# Altium PCB motherboard.PcbDoc
Units mil, origin at the board's own origin, x right, y up, seen from the top; angles counter-clockwise.
Board outline 6000 x 4000 mil, 2 copper layers (Top Layer, Bottom Layer); 50 components, 52 nets, 326 pads, 99 vias.
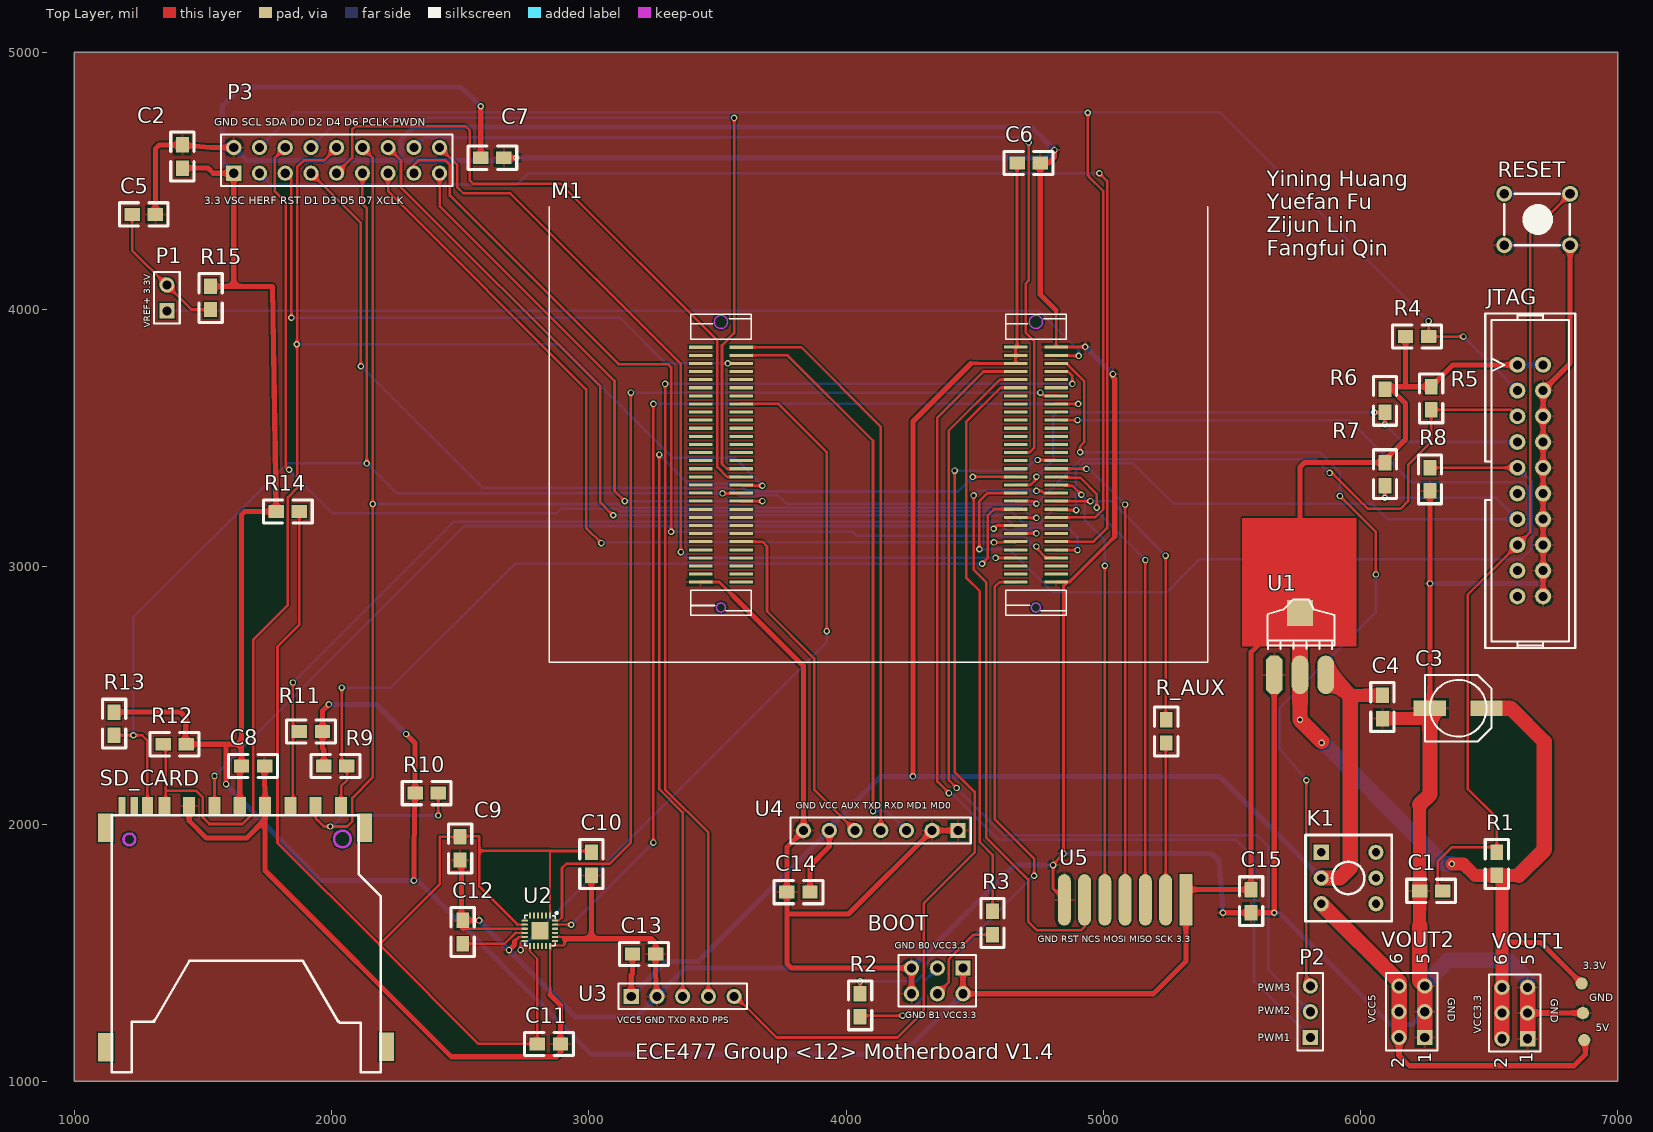
[diagram p0: Top Layer view]
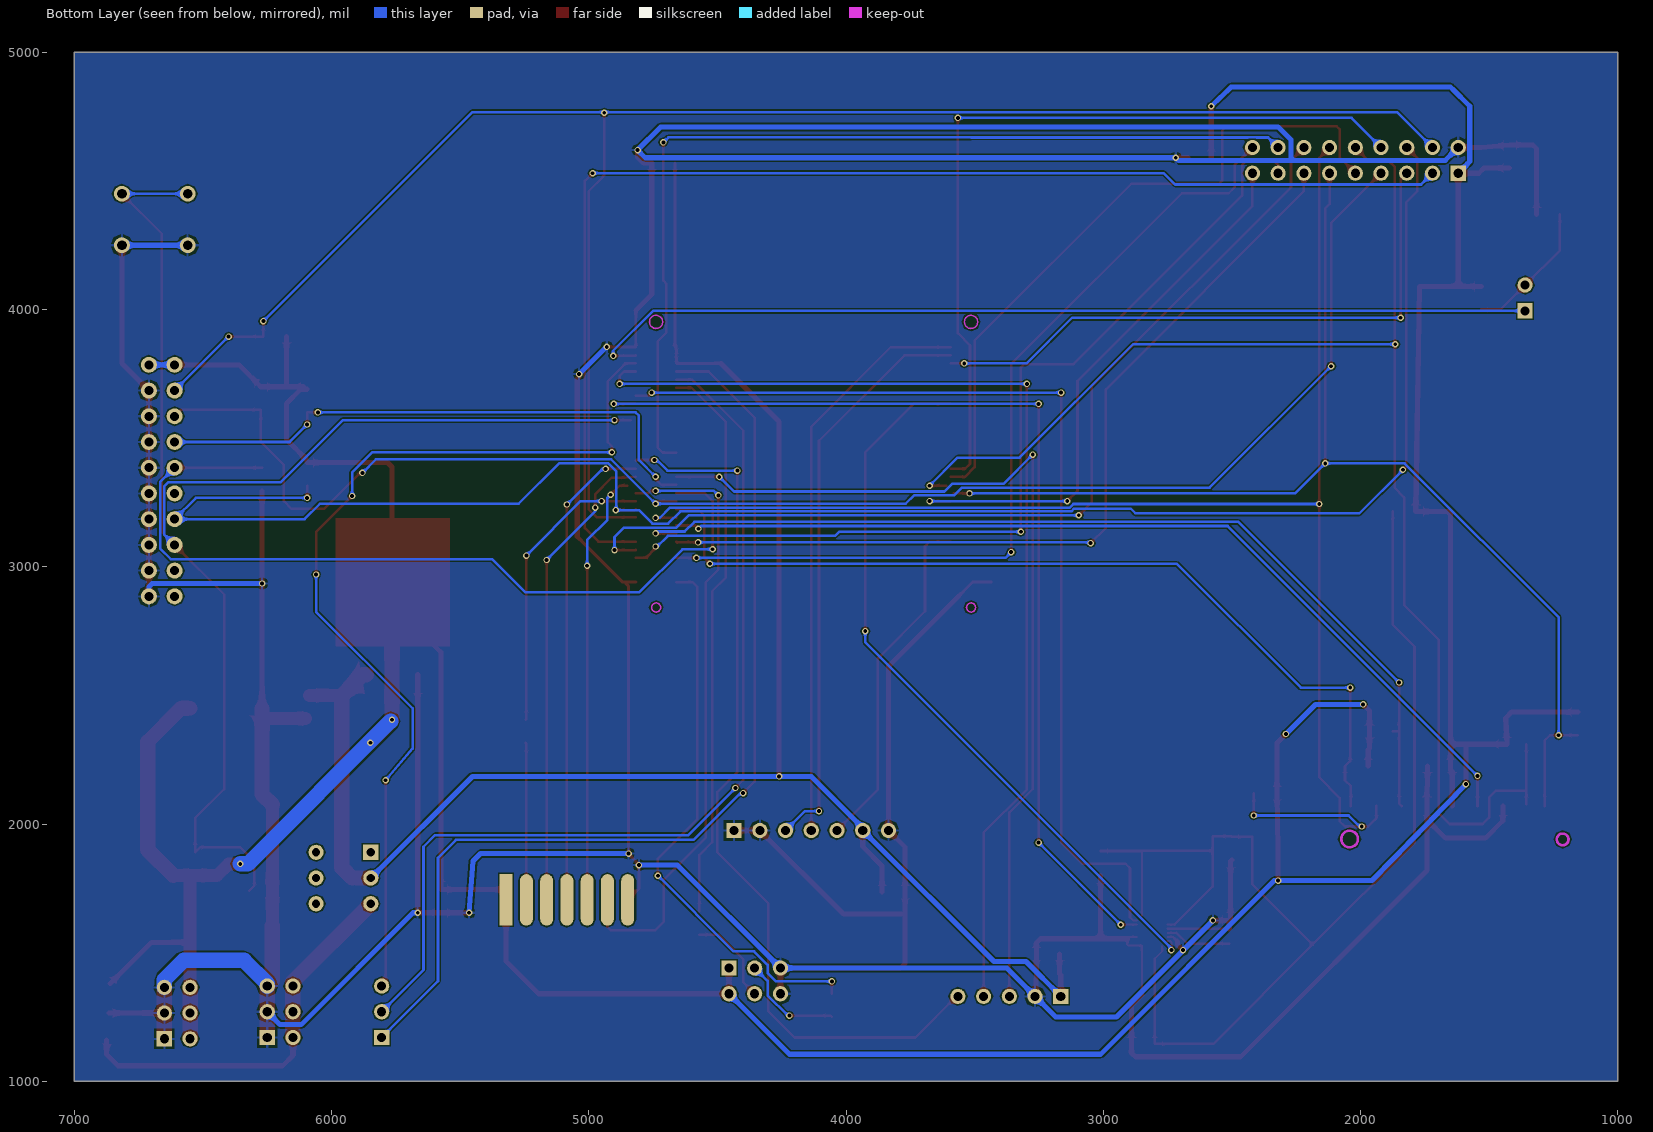
[diagram p1: Bottom Layer view, seen from below]

## Layer stack, top to bottom
Top Solder: solder mask 0.4, Solder Resist, Dk 3.5
Top Layer: signal copper 1.4
Dielectric 1: dielectric 12.6, FR-4, Dk 4.8
Bottom Layer: signal copper 1.4
Bottom Solder: solder mask 0.4, Solder Resist, Dk 3.5

## Board outline
1000,1000 7000,1000 7000,5000 1000,5000

## Design rules (kind name [scope] priority, off if disabled: settings)
Clearance Clearance_1 [All] p1: gap=5 ignorepadtopadclearanceinfootprint=TRUE except(0: Arc-Hole Track-Hole SMDPad-Hole THPad-Hole Via-Hole Fill-Hole Poly-Hole Region-Hole Text-Hole; 2: SMDPad-SMDPad)
Clearance [InNet('GND') vs InNet('VCC5')] p2: gap=10 ignorepadtopadclearanceinfootprint=TRUE
ComponentClearance [All] p1: gap=6 collisioncheckmode=3 verticalgap=10 showdistances=FALSE
FlightTimeFalling [All] p1: maximum=1.000n
FlightTimeRising [All] p1: maximum=1.000n
HoleToHoleClearance [All] p1: gap=0 allowstackedmicrovias=TRUE
MaxMinImpedance [All] p1: minimum=1.000 maximum=10.00
MinimumSolderMaskSliver imu_min_solder_mask_silver [HasFootprint('QFN24-t') vs HasFootprint('No Footprint')] p1: minsoldermaskwidth=10
MinimumSolderMaskSliver all_min_solder_mask_silver [All vs HasFootprint('No Footprint')] p2: minsoldermaskwidth=0
OvershootFalling [All] p1: maximum=1.000
OvershootRising [All] p1: maximum=1.000
ParallelSegment dcmi [InNetClass('dcmi') vs InNetClass('dcmi')] p1: limit=10000 gap=10
ParallelSegment sdio [InNetClass('sdio') vs InNetClass('sdio')] p2: limit=10000 gap=10
ParallelSegment spi [InNetClass('spi') vs InNetClass('spi')] p3: limit=10000 gap=10
PolygonConnect [All] p1: connectstyle=Relief reliefconductorwidth=10 reliefentries=4 polygonreliefangle="90 Angle" airgapwidth=10
RoutingVias [All] p1: holewidth=15 width=25 viastyle="Through Hole" minholewidth=15 minwidth=25 maxholewidth=15 maxwidth=25
SMDNeckDown [All] p1: percent=100.000
SignalBaseValue [All] p1: maximum=0.000
SignalStimulus [All] p1: kind=1 level=0 starttime=10.00n stoptime=60.00n periodtime=100.0n
SignalTopValue [All] p1: minimum=5.000
SilkToSilkClearance [All] p1: silktosilkclearance=0
SilkToSolderMaskClearance imu_silk_to_solder [IsPad vs HasFootprint('QFN24-t')] p1: minsilkscreentomaskgap=0 clearancetoexposedcopper=TRUE
SilkToSolderMaskClearance "all silk to solder" [IsPad] p2: minsilkscreentomaskgap=0 clearancetoexposedcopper=TRUE
SlopeFalling [All] p1: maxslope=1.000n
SlopeRising [All] p1: maxslope=1.000n
SolderMaskExpansion [All] p1: expansion=4
SupplyNets [All] p1: voltage=0.000
UndershootFalling [All] p1: maximum=1.000
UndershootRising [All] p1: maximum=1.000
Width vcc5 [InNet('VCC5')] p1: maxlimit=60 minlimit=10 preferedwidth=20 minimp=50.000000 maximp=50.000000 favimp=50.000000
Width gnd [InNet('GND')] p2: maxlimit=60 minlimit=7 preferedwidth=20 minimp=50.000000 maximp=50.000000 favimp=50.000000
Width vcc3 [InNet('VCC3.3')] p3: maxlimit=60 minlimit=10 preferedwidth=20 minimp=50.000000 maximp=50.000000 favimp=50.000000
Width vbtn [InNet('VBTN')] p4: maxlimit=60 minlimit=20 preferedwidth=20 minimp=50.000000 maximp=50.000000 favimp=50.000000
Width [All] p5: maxlimit=20 minlimit=7 preferedwidth=10 minimp=50.000000 maximp=50.000000 favimp=50.000000
25 further rules are at their usual default settings.

## Components (designator, comment, footprint, x,y, rotation, side; value= is the part's Value field where it differs from the comment)
3.3V "TEST POINT" TP-1.5 6860,1380 r0 top locked
5V "TEST POINT" TP-1.5 6870,1160 r0 top locked
BOOT "BOOT" HDR2X3 4455,1440 r180 top
C1 "104" 0805 6320,1740 r180 top
C2 "104" 0805 1420.06,4640 r270 top
C3 "220uF" CC6.56.5 6380,2450 r180 top
C4 "104" 0805 6085.06,2500 r270 top
C5 "6pF" 0805 1315,4370 r180 top
C6 "104" 0805 4755,4569.94 r180 top
C7 "104" 0805 2580,4590.06 r0 top
C8 "104" 0805 1740,2224.94 r180 top
C9 "104" 0805 2499.94,1860 r90 top
C10 "104" 0805 3009.94,1800 r90 top
C11 "104" 0805 2890,1145 r180 top
C12 "104" 0805 2510,1625 r270 top
C13 "104" 0805 3260,1494.94 r180 top
C14 "104" 0805 3770,1735.06 r0 top
C15 "104" 0805 5575.06,1745 r270 top
GND "TEST POINT" TP-1.5 6865,1265 r0 top locked
JTAG "JTAG" JTAG_20 6660,3335 r270 top
K1 "BUTTON" BTN8.5*8.5 5847.4,1890 r0 top
M1 "STM32F4&F7_CB" STM32F4&F7_CB 4817,3853.46 r180 top
P1 "VREF_SEL" HDR1X2 1360,3995 r90 top
P2 "PWM" HDR1X3 5805,1170 r90 top
P3 "OV5640" HDR2X9 1620,4530 r0 top
R1 "0R" 0805 6530,1890 r270 top
R2 "10K" 0805 4055.06,1340 r270 top
R3 "10K" 0805 4569.94,1570 r90 top
R4 "10K" 0805 6175,3895.06 r0 top
R5 "10K" 0805 6275.06,3700 r270 top
R6 "10K" 0805 6095,3690 r270 top
R7 "10K" 0805 6095.06,3405 r270 top
R8 "10K" 0805 6269.94,3295 r90 top
R9 "47K" 0805 2060,2224.94 r180 top
R10 "47K" 0805 2415,2119.94 r180 top
R11 "47K" 0805 1875,2360 r0 top
R12 "47K" 0805 1345,2310.06 r0 top
R13 "47K" 0805 1154.94,2345 r90 top
R14 "10R" 0805 1875,3215 r180 top
R15 "10R" 0805 1530,4000 r90 top
R_AUX "0R" 0805 5245.06,2405 r270 top
RESET "KEY_M" KEY_M 6559.09,4450 r0 top
SD_CARD "sd card" SDCARD_L 1938,2070 r0 top
U1 "AMS1117-3.3" AMS1117 5664.97,2580.06 r0 top
U2 "MPU9250" QFN24-t 2849.5,1644 r270 top
U3 "GPS" HDR1X5 3165,1330 r0 top
U4 "AS61-T17" HDR1X7 4435,1975 r180 top
U5 "NA" "Edge Connector7" 5321.22,1705 r180 top
VOUT1 "VCC3.3" HDR2X3 6650,1165 r90 top
VOUT2 "VCC5" HDR2X3 6250,1170 r90 top

## Footprints (in the part's own frame and the unit in brackets; to place one, negate y for a bottom-side part, rotate by r counter-clockwise, add the part's x,y. Pads: shape width x height; smd on the part's side, far side on the other; paste and mask are expansions set on the pad)
0805 [mil]
  rect 60x50 smd: 1(0,-0.06) 2(90,-0.06)
  silkscreen extent -50,-45 140,45
AMS1117 [mil]
  oct 65x150 smd: 1(0.03,-0.06)
  oval 65x150 smd: 2(100.03,-0.06) 3(200.03,-0.06)
  rect 100x100 smd: 4(100.03,239.94)
  silkscreen extent -26,100 234,293
BTN8.5*8.5 [mm]
  rect 1.5x1.5 hole 0.8: 1(0,0)
  round 1.5 hole 0.8: 2(0,-2.54) 3(0,-5.08) 4(5.4,-5.08) 5(5.4,-2.54) 6(5.4,0)
  silkscreen extent -1.55,-6.79 6.95,1.71
CC6.56.5 [mm]
  rect 3.2x1.5 smd: 1(-2.794,0) 2(2.8,0)
  silkscreen extent -3.3,-3.3 3.3,3.3
"Edge Connector7" [mm]
  rect 1.27x5.08 smd: 1(0,0)
  oval 1.27x5.08 smd: 2(2,0) 3(4,0) 4(6,0) 5(8,0) 6(10,0) 7(12,0)
  rect 1.27x5.08 smd far side: B1(0,0)
  oval 1.27x5.08 smd far side: B2(2,0) B3(4,0) B4(6,0) B5(8,0) B6(10,0) B7(12,0)
HDR1X2 [mm]
  rect 1.5x1.5 hole 0.9: 1(0,0)
  round 1.5 hole 0.9: 2(2.54,0)
  silkscreen extent -1.27,-1.27 3.81,1.27
HDR1X3 [mm] "Connector; Header; 3 Position"
  rect 1.5x1.5 hole 0.9: 1(0,0)
  round 1.5 hole 0.9: 2(2.54,0) 3(5.08,0)
  silkscreen extent -1.27,-1.27 6.35,1.27
HDR1X5 [mm] "Connector; Header; 5 Position"
  rect 1.5x1.5 hole 0.9: 1(0,0)
  round 1.5 hole 0.9: 2(2.54,0) 3(5.08,0) 4(7.62,0) 5(10.16,0)
  silkscreen extent -1.27,-1.27 11.43,1.27
HDR1X7 [mm] "Connector; Header; 7 Position"
  rect 1.5x1.5 hole 0.9: 1(0,0)
  round 1.5 hole 0.9: 2(2.54,0) 3(5.08,0) 4(7.62,0) 5(10.16,0) 6(12.7,0) 7(15.24,0)
  silkscreen extent -1.27,-1.27 16.51,1.27
HDR2X3 [mm]
  rect 1.5x1.5 hole 0.9: 1(0,0)
  round 1.5 hole 0.9: 2(0,2.54) 3(2.54,0) 4(2.54,2.54) 5(5.08,0) 6(5.08,2.54)
  silkscreen extent -1.27,-1.27 6.35,3.81
HDR2X9 [mm]
  rect 1.5x1.5 hole 0.9: 1(0,0)
  round 1.5 hole 0.9: 2(0,2.54) 3(2.54,0) 4(2.54,2.54) 5(5.08,0) 6(5.08,2.54) 7(7.62,0) 8(7.62,2.54) 9(10.16,0) 10(10.16,2.54) 11(12.7,0) 12(12.7,2.54) 13(15.24,0) 14(15.24,2.54) 15(17.78,0) 16(17.78,2.54) 17(20.32,0) 18(20.32,2.54)
  silkscreen extent -1.27,-1.27 21.59,3.81
JTAG_20 [mil]
  round 62 hole 35: 1(-450,-50) 2(-450,50) 3(-350,-50) 4(-350,50) 5(-250,-50) 6(-250,50) 7(-150,-50) 8(-150,50) 9(-50,-50) 10(-50,50) 11(50,-50) 12(50,50) 13(150,-50) 14(150,50) 15(250,-50) 16(250,50) 17(350,-50) 18(350,50) 19(450,-50) 20(450,50)
  silkscreen extent -650,-175 650,175
KEY_M [mil]
  round 62 hole 38: 1(0,0) 1(255.91,0) 2(0,-200) 2(255.91,-200)
  silkscreen extent 0,-200 255,0
QFN24-t [mm]
  rrect50% 0.6x0.2 smd: 1(0,0) 2(0,-0.4) 3(0,-0.8) 4(0,-1.2) 5(0,-1.6) 6(0,-2) 13(3,-2) 14(3,-1.6) 15(3,-1.2) 16(3,-0.8) 17(3,-0.4) 18(3,0)
  rrect50% 0.2x0.6 smd: 7(0.5,-2.5) 8(0.9,-2.5) 9(1.3,-2.5) 10(1.7,-2.5) 11(2.1,-2.5) 12(2.5,-2.5) 19(2.5,0.5) 20(2.1,0.5) 21(1.7,0.5) 22(1.3,0.5) 23(0.9,0.5) 24(0.5,0.5)
  rect 1.7x1.7 smd: 25(1.499,-1.003)
  silkscreen extent -0.36,-2.5 3,0.76
SDCARD_L [mm]
  rect 1.2x1.8 smd: 1(0,0) 2(-2.489,0) 3(-4.983,-0.009) 4(-7.483,-0.009) 5(-9.983,-0.009) 6(-12.483,-0.009) 7(-14.908,-0.009) 9(2.517,-0.009)
  rect 1.1x1.8 smd: 8(-16.612,0)
  rect 0.7x1.8 smd: 10(-17.908,-0.009) 12(-19.101,0)
  rect 1.5x2.8 smd: 11(-20.726,-23.834) 11(-20.726,-2.143) 11(4.826,-2.143) 11(7.01,-23.784)
  Keep-Out Layer circle w0.254: c-18.39,-3.3 r0.58
  Keep-Out Layer circle w0.254: c2.642,-3.26 r0.82
  silkscreen extent -20.13,-26.3 6.44,-0.9
STM32F4&F7_CB [mm]
  rect 2.3x0.3 smd: J1_1(0,0) J1_2(0,0.8) J1_3(0,1.6) J1_4(0,2.4) J1_5(0,3.2) J1_6(0,4) J1_7(0,4.8) J1_8(0,5.6) J1_9(0,6.4) J1_10(0,7.2) J1_11(0,8) J1_12(0,8.8) J1_13(0,9.6) J1_14(0,10.4) J1_15(0,11.2) J1_16(0,12) J1_17(0,12.8) J1_18(0,13.6) J1_19(0,14.4) J1_20(0,15.2) J1_21(0,16) J1_22(0,16.8) J1_23(0,17.6) J1_24(0,18.4) J1_25(0,19.2) J1_26(0,20) J1_27(0,20.8) J1_28(0,21.6) J1_29(0,22.4) J1_30(0,23.2) J1_31(4,23.2) J1_32(4,22.4) J1_33(4,21.6) J1_34(4,20.8) J1_35(4,20) J1_36(4,19.2) J1_37(4,18.4) J1_38(4,17.6) J1_39(4,16.8) J1_40(4,16) J1_41(4,15.2) J1_42(4,14.4) J1_43(4,13.6) J1_44(4,12.8) J1_45(4,12) J1_46(4,11.2) J1_47(4,10.4) J1_48(4,9.6) J1_49(4,8.8) J1_50(4,8) J1_51(4,7.2) J1_52(4,6.4) J1_53(4,5.6) J1_54(4,4.8) J1_55(4,4) J1_56(4,3.2) J1_57(4,2.4) J1_58(4,1.6) J1_59(4,0.8) J1_60(4,0) J2_1(31.1,0.001) J2_2(31.1,0.801) J2_3(31.1,1.601) J2_4(31.1,2.401) J2_5(31.1,3.201) J2_6(31.1,4.001) J2_7(31.1,4.801) J2_8(31.1,5.601) J2_9(31.1,6.401) J2_10(31.1,7.201) J2_11(31.1,8.001) J2_12(31.1,8.801) J2_13(31.1,9.601) J2_14(31.1,10.401) J2_15(31.1,11.201) J2_16(31.1,12.001) J2_17(31.1,12.801) J2_18(31.1,13.601) J2_19(31.1,14.401) J2_20(31.1,15.201) J2_21(31.1,16.001) J2_22(31.1,16.801) J2_23(31.1,17.601) J2_24(31.1,18.401) J2_25(31.1,19.201) J2_26(31.1,20.001) J2_27(31.1,20.801) J2_28(31.1,21.601) J2_29(31.1,22.401) J2_30(31.1,23.201) J2_31(35.1,23.201) J2_32(35.1,22.401) J2_33(35.1,21.601) J2_34(35.1,20.801) J2_35(35.1,20.001) J2_36(35.1,19.201) J2_37(35.1,18.401) J2_38(35.1,17.601) J2_39(35.1,16.801) J2_40(35.1,16.001) J2_41(35.1,15.201) J2_42(35.1,14.401) J2_43(35.1,13.601) J2_44(35.1,12.801) J2_45(35.1,12.001) J2_46(35.1,11.201) J2_47(35.1,10.401) J2_48(35.1,9.601) J2_49(35.1,8.801) J2_50(35.1,8.001) J2_51(35.1,7.201) J2_52(35.1,6.401) J2_53(35.1,5.601) J2_54(35.1,4.801) J2_55(35.1,4.001) J2_56(35.1,3.201) J2_57(35.1,2.401) J2_58(35.1,1.601) J2_59(35.1,0.801) J2_60(35.1,0.001)
  Keep-Out Layer circle w0.152: c33.1,25.701 r0.45
  Keep-Out Layer circle w0.152: c33.1,-2.499 r0.65
  Keep-Out Layer circle w0.152: c2,-2.5 r0.65
  Keep-Out Layer circle w0.152: c2,25.7 r0.45
  silkscreen extent -14.95,-13.87 50.05,31.13
TP-1.5 [mm]
  round 1.2 smd: 1(0,0)

## Part data
3.3V 5V GND: library part TEST-POINT, "测试点"
BOOT VOUT1 VOUT2: library part "Header 3X2", "Header, 3-Pin, Dual row"
  VOUT1 VOUT2: LatestRevisionDate=17-Jul-2002, LatestRevisionNote="Re-released for DXP Platform.", Publisher="Altium Limited"
C1 C2 C4 C5 C6 C7 C8 C9 C10 C11 C12 C13 C14 C15: library part C
C3: library part CAP
M1: "F429/746 Core Board"
P1: library part "Header 2", "Header, 2-Pin"
P2: library part "Header 3", "Header, 3-Pin", LatestRevisionDate=17-Jul-2002, LatestRevisionNote="Re-released for DXP Platform.", Publisher="Altium Limited"
P3: library part "Header 9X2", "Header, 9-Pin, Dual row"
R1 R2 R3 R4 R5 R6 R7 R8 R9 R10 R11 R12 R13 R14 R15 R_AUX: library part R
U1: library part AMS1117
U2: "9轴运动处理传感器"
U3: library part "Header 5", "Header, 5-Pin", LatestRevisionDate=17-Jul-2002, LatestRevisionNote="Re-released for DXP Platform.", Publisher="Altium Limited"
U4: library part "Header 7", "Header, 7-Pin", LatestRevisionDate=17-Jul-2002, LatestRevisionNote="Re-released for DXP Platform.", Publisher="Altium Limited"
U5: library part ESP8266SPI

## Via types
v1: diameter 25, hole 15, Top Layer to Bottom Layer, tented both sides, 99 vias

## Nets (pads, with @x,y where several pads share a name; then routed paths per layer and width w, separated by ;. In a path a pad name is that pad's centre, name@x,y a point inside that pad or via, vN(x,y) a via of type N, cw(c..) or ccw(c..) an arc to the next point about the centre after c; other vN are vias at no path point)
9D_INT: M1.J2_8 U2.12 | length 2887.9
  Top Layer w7.87: v1(2735,1510) 2735,1541.57 2739,1545.57 U2.12
  Top Layer w10: M1.J2_8@3592.48,3632.95 M1.J2_8 3737.5,3632.95 3925,3445.45 v1(3925,2750)
  Bottom Layer w7.87: v1(2735,1510) 2735,1516 v1@2739,1520
  Bottom Layer w10: v1@2739,1520 3925,2706 v1(3925,2750)
AS_AUX: M1.J2_25 U4.5 | length 1354.2
  Top Layer w10: M1.J2_25@3592.48,3097.52 M1.J2_25 3675,3097.52 3693,3079.52 3693,2827 3876,2644 3876,2134 U4.5
AS_RXD: M1.J2_2 U4.3 | length 2251
  Top Layer w10: M1.J2_2@3592.48,3821.93 3773,3821.93 4105,3489.93 v1(4105,2050)
  Bottom Layer w10: v1(4105,2050) 4160,2050 U4.3
AS_TXD: M1.J2_1 U4.4 | length 2240.3
  Top Layer w10: M1.J2_1@3592.48,3853.42 M1.J2_1 3826.58,3853.42 4135,3545 U4.4
BOOT0: M1.J1_31 R2.1 | length 2188.4
  Top Layer w10: R2.1 v1(4055,1388) ; M1.J1_31@4659.39,2940.08 4597.08,2940.08 4577.5,2920.5 4577.5,2019 4731,1865.5 v1(4731,1799)
  Bottom Layer w10: v1(4055,1388) 4273,1388 4305,1420 4305,1452.5 4357.5,1505 4437,1505 v1(4731,1799)
BOOT1: M1.J1_55 R3.2 | length 2192.6
  Top Layer w10: R3.2 4570,1880 4520,1930 4520,2905 4467,2958 4467,3562 4600.98,3695.98 M1.J1_55@4659.39,3695.98
DCMI_D0: M1.J2_16 P3.8 | length 3139.5
  Top Layer w10: v1(3565,4745) 3565,3908 3517.93,3860.93 3517.93,3400.05 3537,3380.98 M1.J2_16@3592.48,3380.98
  Bottom Layer w10: P3.8 2035,4745 v1(3565,4745)
DCMI_D1: M1.J2_17 P3.9 | length 2679.2
  Top Layer w10: P3.9 2080,4590 2080,4700 2092.5,4712.5 2520,4712.5 2537.5,4695 2537.5,4501.5 2550,4489 2891,4489 3500,3880 3500,3387 3537.51,3349.49 M1.J2_17@3592.48,3349.49
DCMI_D2: M1.J2_18 P3.10 R12.1 SD_CARD.7 | length 5557.1
  Top Layer w10: SD_CARD.7@1355,2076.07 R12.1@1355,2310 ; 1361.07,2130 1473,2130 1500,2103 1500,2025 1525,2000 1654,2000 1695,2041 1695,2716 1830,2851 1830,3270 1866.5,3306.5 1866.5,3863.5 v1(1865,3865) ; v1@1866.5,3865 1866.5,4553.5 1893,4580 1970,4580 P3.10 ; M1.J2_18@3609.49,3315 v1(3675,3315)
  Bottom Layer w10: v1(1865,3865) 2884,3865 3325,3424 3566,3424 v1(3675,3315)
DCMI_D3: M1.J2_19 P3.11 R13.1 SD_CARD.8 | length 4633.4
  Top Layer w10: R13.1 1264,2345 1284,2325 1284,2169 SD_CARD.8 ; P3.11 2120,4410 2137,4393 v1(2137,3402) ; v1(3520,3285) M1.J2_19@3580.98,3285
  Bottom Layer w10: v1(1230,2345) 1230,2803.82 1828.18,3402 v1(2137,3402) 2254,3285 v1(3520,3285)
DCMI_D4: M1.J1_39 P3.12 R10.1 SD_CARD.1 | length 6114.9
  Top Layer w10: SD_CARD.1 1938,2022 1940.5,2019.5 ; 1938.04,2022 1940.5,2019.5 ; 1973.33,1990.31 v1(1995,1990.15) ; P3.12 2160,4590 v1(2160,3244) 2160,2181 2080.63,2101.63 2080.63,2010.63 2060.15,1990.15 v1(1995,1990.15) ; v1(2415,2033) R10.1 ; M1.J1_39@4659.39,3192.05 4661.44,3190 v1(4740,3190) ; 1940.5,2019.5 1944.57,2015.37 1944.63,2015.37 1969.85,1990.15 v1(1995,1990.15)
  Bottom Layer w10: v1(1995,1990.15) 2003.15,1990.15 2046,2033 v1(2415,2033) ; v1(2160,3244) 3116,3244 3130,3230 4684.05,3230 4724.05,3190 v1(4740,3190)
DCMI_D5: M1.J1_36 P3.13 | length 3394.5
  Top Layer w10: P3.13 2220,4460 2990,3690 2990,3151 v1(3049,3092) ; v1(4575,3095) 4655.72,3095 4656.28,3094.44 M1.J1_36@4659.39,3097.56
  Bottom Layer w10: v1(3049,3092) 3052,3095 v1(4575,3095)
DCMI_D6: M1.J1_26 P3.14 | length 3756.2
  Top Layer w10: P3.14 2270,4580 2270,4475 3045,3700 3045,3250 v1(3095,3200) ; M1.J1_26@4816.87,3066.06 4817.94,3065 v1(4900,3065)
  Bottom Layer w10: v1@3105,3200 4611.57,3200 4659.07,3152.5 4862.5,3152.5 4900,3115 v1(4900,3065)
DCMI_D7: M1.J1_27 P3.15 | length 3624.7
  Top Layer w10: P3.15 2320,4562.5 2337.5,4580 2442.5,4580 2460,4562.5 2460,4443 3115.5,3787.5 3307.5,3787.5 3320,3775 v1(3320,3136) ; v1(4740,3078.78) 4740,3072.57 4778,3034.57 M1.J1_27@4816.87,3034.57
  Bottom Layer w10: v1(3320,3136) 4027,3136 4043,3120 4692.57,3120 4733.78,3078.78 v1(4740,3078.78)
DCMI_HREF: M1.J2_3 P3.5 | length 2394
  Top Layer w10: P3.5 1844,4506 v1(1844,3968) ; v1(3540.43,3790.43) M1.J2_3@3592.48,3790.43
  Bottom Layer w10: v1(1844,3968) 3121,3968 3298.57,3790.43 v1(3540.43,3790.43)
DCMI_PCLK: M1.J1_47 P3.16 | length 3700.5
  Top Layer w10: M1.J1_47@4659.39,3444.01 M1.J1_47 4712.51,3444.01 4731,3462.5 4731,3877 4698,3910 4698,4100 4710,4112 v1(4710,4650)
  Bottom Layer w10: P3.16 2358.76,4668.76 2402.86,4668.76 2403.63,4669.53 2436.37,4669.53 2437.14,4668.76 3512.42,4668.76 3513.19,4669.53 4690.47,4669.53 v1(4710,4650)
DCMI_PWDN: M1.J1_34 P3.18 | length 3378.8
  Top Layer w10: P3.18 2489,4561 2489,4475 2512,4452 2694,4452 3358,3788 v1(3358,3057) ; v1(4581.43,3034.57) M1.J1_34@4659.39,3034.57
  Bottom Layer w10: v1(3358,3057) 3380.43,3034.57 v1(4581.43,3034.57)
DCMI_RESET: JTAG.5 M1.J1_41 P3.7 R5.2 | length 6109.7
  Top Layer w10: P3.7 2114,4336 v1(2114,3779.5) ; M1.J1_41@4659.39,3255.04 M1.J1_41 4729.96,3255.04 v1(4740,3245) ; v1(5880,3365) 5890,3365 6030,3225 6155,3225 6185,3255 6185,3395 6275,3485 R5.2 6585,3610 JTAG.5
  Bottom Layer w10: v1(2114,3779.5) 2586,3307.5 3549.65,3307.5 3579.65,3277.5 3735.5,3277.5 3768,3245 v1(4740,3245) 4913.01,3418.01 5826.99,3418.01 v1(5880,3365)
DCMI_SCL: JTAG.3 M1.J1_22 P3.4 R4.2 | length 7190.2
  Top Layer w10: M1.J1_22@4816.87,3192.05 M1.J1_22 4968.87,3192.05 5000,3223.18 5000,4460 4945,4515 ; v1(4940,4765) 4940,4523 4945,4518 ; v1(6265,3955) R4.2 v1(6400,3895)
  Bottom Layer w10: P3.4 1857.5,4767.5 4940,4767.5 5452.5,4767.5 v1(6265,3955) ; v1(6400,3895) JTAG.3
DCMI_SDA: JTAG.13 M1.J1_21 P3.6 R7.2 | length 7124.3
  Top Layer w10: P3.6 1780,4590 1780,4459 1821.23,4417.77 1821.23,3390.77 v1(1835,3377) ; M1.J1_21 4820.54,3220 v1(4895,3220) ; v1(6095,3268) R7.2
  Bottom Layer w10: v1(1835,3377) 2004,3208 2875,3208 2893,3226 3112.79,3226 3123.79,3215 4643.92,3215 4691.42,3167.5 4752.5,3167.5 4805,3220 v1(4895,3220) 4892.5,3222.5 4892.5,3370.34 4925.17,3403.01 5114.49,3403.01 5272.5,3245 6045,3245 6105,3185 JTAG.13 6527,3268 v1(6095,3268)
DCMI_VSYNC: M1.J1_25 P3.3 | length 4913.7
  Top Layer w10: M1.J1_25@4816.87,3097.56 M1.J1_25 4962.56,3097.56 5015,3150 5015,3324.57 5015,4500 v1(4985,4530)
  Bottom Layer w10: P3.3 1764,4486 2721,4486 2765,4530 v1(4985,4530)
DCMI_XCLK: M1.J2_20 P3.17 | length 2190.8
  Top Layer w10: P3.17 2420,4403 3100,3723 3100,3295 v1(3140,3255) ; M1.J2_20@3592.48,3255 M1.J2_20 v1(3675,3255)
  Bottom Layer w10: v1(3140,3255) v1(3675,3255)
GND: BOOT.5 BOOT.6 C1.2 C2.1 C3.2 C4.2 C5.1 C6.1 C7.2 C8.1 C9.1 C10.1 C11.1 C12.1 C13.1 C14.1 C15.2 GND.1 JTAG.4 JTAG.6 JTAG.8 JTAG.10 JTAG.12 JTAG.14 JTAG.16 JTAG.18 JTAG.20 M1.J1_1 M1.J1_30 M1.J2_31 P3.2 R8.1 RESET.2 SD_CARD.3 SD_CARD.6 U1.1 U2.9 U2.11 U2.18 U2.20 U3.2 U4.1 U4.2 U4.7 U5.7 VOUT1.1 VOUT1.3 VOUT1.5 VOUT2.1 VOUT2.3 VOUT2.5 | length 28478.7
  Top Layer w7.87: 2511.75,1592.82 U2.9 ; 2711,1543 2729.32,1561.32 U2.11 ; 2849.5,1336 U2.18 2849.5,1527 2902,1527 2906,1531 2906,1554 2898.68,1561.32 U2.20
  Top Layer w10: M1.J1_1 4817,3996
  Top Layer w11.81: M1.J2_31@3435,2940.04 M1.J2_31 3508,2940.04 3562,2886.04 ; M1.J1_30@4816.87,2940.08 M1.J1_30 M1.J1_30@4848.78,2940.08 ; M1.J1_1@4816.87,3853.46 M1.J1_1 4818.54,3855 v1(4930,3855) ; U5.7 4805,1748.78 v1(4805,1840) 4805,1842.5 4845,1882.5 v1(4845,1885) 4845,2923.86 4855,2933.86 M1.J1_30@4848.78,2940.08 ; 5045,3117.08 4868,2940.08 M1.J1_30@4848.78,2940.08
  Top Layer w20: C5.1 1315,4625 1330,4640 C2.1 1530,4630 P3.2 ; SD_CARD.6 1446.54,2012.28 1513.82,1945 1668.99,1945 1741.82,2017.83 ; C8.1 1740,2147.82 1741.82,2146 SD_CARD.3 1741.82,2017.83 ; C9.1 2504.97,1855.03 2504.97,1629.97 C12.1 ; 2511.75,1592.82 2509.94,1594.63 C12.1 ; v1(2573.5,1625) C12.1 ; C7.2 v1(2718,4590) ; v1(2690,1510) 2711,1531 2711,1543 ; 2849.5,1336 2890,1295.5 C11.1 2890,1110 2875,1095 2465.82,1095 1741.82,1819 1741.82,2017.83 ; 2906,1554 3010,1554 ; C10.1 3010,1554 ; U3.2 3260,1418 C13.1 3260,1537.5 3243.5,1554 3010,1554 ; 3562,2886.04 3835,2613.04 U4.7 3770,1910 C14.1 3770,1457.5 3787.5,1440 BOOT.5 BOOT.6 ; 3775,1650 4010,1650 U4.2 U4.1 ; v1(4810,4620) 4810,4592.5 4787.5,4570 C6.1 4755,4058 4817,3996 ; v1(5037.5,3749.21) 5037.5,3737.96 5045,3730.46 5045,3117.08 ; v1(5465,1655) C15.2 v1(5665,1655) U1.1 ; VOUT2.1@6250,1150 VOUT2.1 ; v1(6269.76,2935) C3.2 6270,2872.47 R8.1 ; VOUT1.3 GND.1 ; JTAG.20 JTAG.18 JTAG.16 JTAG.14 JTAG.12 JTAG.10 JTAG.8 JTAG.6 JTAG.4 6815,3790 RESET.2@6815,4250
  Top Layer w50: C4.2@6100,2410 6255,2410 ; 6230,1615 C1.2 6230,2075
  Top Layer w58: 6269.76,2114.76 C3.2
  Top Layer w60: 6230,1605 6230,1390 VOUT2.5 VOUT2.3 VOUT2.1 ; 6230,2075 6269.76,2114.76 ; VOUT1.1 VOUT1.3 VOUT1.5
  Bottom Layer w20: P3.2 1670,4580 2260,4580 ; v1(2573.5,1625) v1@2690,1508.5 ; v1(2690,1510) v1@2690,1508.5 ; v1(4805,1840) 4655,1840 BOOT.5 3375,1440 U3.2 3185,1250 2948.5,1250 v1@2690,1508.5 ; v1(4845,1885) 5421,1885 5450,1856 v1(5465,1655) ; v1(4930,3855) 4930.86,3855 5036.64,3749.21 v1(5037.5,3749.21) ; v1(5665,1655) 5683,1655 6118,1220 6200,1220 VOUT2.3 ; v1(6269.76,2935) 6697,2935 6710,2922 JTAG.20 ; RESET.2@6559.09,4250 RESET.2@6815,4250 ; 2260,4580 2708,4580 v1(2718,4590) 4780,4590 v1(4810,4620) 4720,4710 2320,4710 2270,4660 2270,4590 2260,4580
  Bottom Layer w60: VOUT2.5 6250,1380 6340,1470 6575,1470 6650,1395 VOUT1.5
GPS_PPS: M1.J1_15 U3.5 | length 3473.3
  Top Layer w10: U3.5@3567.5,1332.5 3730,1170 4200,1170 4302.5,1272.5 4302.5,1692.5 4500,1890 4500,2125 4422,2203 v1(4422,3374) ; v1(4745,3415) 4814.39,3415 M1.J1_15@4816.87,3412.52
  Bottom Layer w10: v1(4422,3374) 4694,3374 4735,3415 v1(4745,3415)
GPS_RXD: M1.J1_4 U3.4 | length 4134.4
  Top Layer w10: v1(3297,3711) 3297,2135 3465,1967 U3.4 ; M1.J1_4@4816.87,3758.98 4862.5,3758.98 4880,3741.48 v1(4880,3711)
  Bottom Layer w10: v1(3297,3711) v1(4880,3711)
GPS_TXD: M1.J1_44 U3.3 | length 3612.1
  Top Layer w10: v1(3274,3436) 3274,2136 3365,2045 U3.3 ; v1(4492.53,3349.53) M1.J1_44@4659.39,3349.53
  Bottom Layer w10: v1(3274,3436) 3387.5,3322.5 3587.55,3322.5 3617.55,3292.5 4435.5,3292.5 v1(4492.53,3349.53)
IIC_SCL: M1.J1_8 U2.23 | length 3957.5
  Top Layer w7.87: U2.23 v1(2932,1608.57)
  Top Layer w10: v1(3251,1927.57) v1(3251,3632.99) ; M1.J1_8@4816.87,3632.99 v1(4903,3632.99)
  Bottom Layer w10: v1(2932,1608.57) v1(3251,1927.57) ; v1(3251,3632.99) v1(4903,3632.99)
IIC_SDA: M1.J1_7 U2.24 | length 3939.5
  Top Layer w7.87: U2.24 2882.82,1624.32 2896,1637.5
  Top Layer w10: 2896,1637.5 2896,1828.5 2912.5,1845 3081,1845 3164,1928 v1(3164,3677) ; v1(4755.98,3677) 4768.49,3664.49 M1.J1_7@4816.87,3664.49
  Bottom Layer w10: v1(3164,3677) v1(4755.98,3677)
JTCK: JTAG.9 M1.J1_42 R8.2 | length 3305.3
  Top Layer w10: v1(4518.5,3068) 4518.5,3255.03 4550,3286.53 M1.J1_42@4659.39,3286.53 ; R8.2 JTAG.9
  Bottom Layer w10: v1(4518.5,3068) 4636,3068 4803,2901 5247,2901 5376,3030 6625,3030 6666,3071 6666,3329 JTAG.9
JTMS: JTAG.7 M1.J1_43 R6.2 | length 2249.3
  Top Layer w10: M1.J1_43@4659.39,3318.03 4717.77,3318.03 4740,3340.26 v1(4740,3350) ; v1(6053,3600) R6.2 6094.94,3553.06 v1(6095,3553)
  Bottom Layer w10: v1(4740,3350) 4805,3415 4805,3587.5 4817.5,3600 v1(6053,3600) ; v1(6095,3553) 6163,3485 JTAG.7
NetBOOT_3: BOOT.3 R2.2 | length 411.4
  Top Layer w10: R2.2 4060,1255 v1(4220,1255)
  Bottom Layer w10: v1(4220,1255) 4225.9,1255 4305,1334.1 4305,1390 BOOT.3
NetBOOT_4: BOOT.4 R3.1 | length 363
  Top Layer w10: BOOT.4 4400,1385 4400,1475 4495,1570 R3.1
NetC5_2: C5.2 P1.2 R15.1 | length 540.4
  Top Layer w10: C5.2 1225,4230 P1.2 1455,4000 R15.1
NetC9_2: C9.2 C10.2 C11.2 R14.1 U2.1 U2.8 U2.13 | length 4843
  Top Layer w7.87: 2723,1608.57 U2.8 ; U2.13 2770.76,1505.24 2800,1476 ; U2.1 2849.5,1895 2849.5,1895.97
  Top Layer w10: R14.1 1875,2775 1790,2690 1790,1926.5 2185.75,1530.75 ; 2723,1608.57 2575,1756.57 2575,1895.97 ; 2800,1476 C11.2 2571.44,1145.06 2185.75,1530.75 ; 2849.5,1895 C10.2@3010,1895 ; 2849.5,1895.97 2575,1895.97 ; 2185.75,1530.75 2420,1765 2420,1950 C9.2 2502.5,1952.5 2575,1952.5 2575,1895.97
NetC12_2: C12.2 U2.10 | length 258.6
  Top Layer w7.87: 2715.46,1577.07 U2.10
  Top Layer w10: C12.2 2673.39,1535 2715.46,1577.07
NetR_AUX_2: R_AUX.2 U5.2 | length 611
  Top Layer w10: U5.2 5242.48,2312.48 R_AUX.2
PWM1: M1.J1_57 P2.1 | length 3936.2
  Top Layer w10: v1(4400,2120) 4355,2165 4355,3579.98 4534,3758.98 M1.J1_57@4659.39,3758.98
  Bottom Layer w10: v1(4400,2120) 4410,2120 4592,1938 5516,1938 5586,1868 5586,1389 P2.1
PWM2: M1.J1_56 P2.2 | length 3759.7
  Top Layer w10: v1(4430,2140) 4399.5,2170.5 4399.5,3528.98 4598,3727.48 M1.J1_56@4659.39,3727.48
  Bottom Layer w10: v1(4430,2140) 4613,1957 5597,1957 5642.5,1911.5 5642.5,1432.5 P2.2
PWM3: M1.J1_3 P2.3 | length 3712.2
  Top Layer w10: M1.J1_3@4816.87,3790.47 M1.J1_3 4857.53,3790.47 4926,3722 4926,3484 4910,3468 v1(4910,3445) ; P2.3@5790,1370 v1(5790,2170) ; v1(5920,3275) 6060,3135 v1(6060,2970)
  Bottom Layer w10: v1(4910,3445) 5841.82,3445 5920,3366.82 v1(5920,3275) ; v1(5790,2170) 5685,2293.53 5685,2450 6060,2825 v1(6060,2970)
RESET: C1.1 JTAG.15 M1.J1_10 R1.1 RESET.1 | length 5577
  Top Layer w10: M1.J1_10@4836.87,3570 v1(4900,3570) ; C1.1 6300,1760.06 6300,1855 6355,1910 6509.94,1910 R1.1 6529.94,2023 6417,2135.94 6417,2892 JTAG.15 6660,3135 6660,4295 RESET.1@6815,4450
  Bottom Layer w10: v1(4900,3570) 5956,3570 6198,3328 6635.5,3328 6651,3312.5 6651,3126 JTAG.15 ; RESET.1@6559.09,4450 RESET.1@6815,4450
SDIO_CMD: M1.J1_37 R11.1 SD_CARD.2 | length 3757.3
  Top Layer w10: SD_CARD.2 1850,2080 R11.1@1850,2359.94 ; v1(1850,2550) R11.1@1850,2359.94 ; R11.1 R11.1@1850,2359.94 ; M1.J1_37@4659.39,3129.05 4660.34,3130 v1(4740,3130)
  Bottom Layer w10: v1(1850,2550) 2474.55,3174.55 4589.45,3174.55 4627,3137 4733,3137 v1(4740,3130)
SDIO_D2: M1.J1_40 R9.1 SD_CARD.9 | length 3482.3
  Top Layer w10: SD_CARD.9 2037.09,2147 2060,2169.91 R9.1 2040,2245 v1(2040,2530) ; v1(4529,3011.5) 4551,3033.5 4551,3200 4574.54,3223.54 M1.J1_40@4659.39,3223.54
  Bottom Layer w10: v1(2040,2530) 2232,2530 2713.5,3011.5 v1(4529,3011.5)
SDIO_SCK: M1.J1_38 SD_CARD.5 | length 3643.7
  Top Layer w10: SD_CARD.5 v1(1544.97,2187) ; v1(4574,3148.05) 4586.5,3160.55 M1.J1_38@4659.39,3160.55
  Bottom Layer w10: v1(1544.97,2187) 2516.51,3158.54 4563.51,3158.54 v1(4574,3148.05)
SPI_MISO: M1.J1_17 U5.3 | length 1839.8
  Top Layer w10: M1.J1_17@4816.87,3349.53 M1.J1_17 4861.03,3346 4910.82,3346 4975,3281.82 v1(4975,3230) ; U5.3 v1(5163.74,3026.26)
  Bottom Layer w10: v1(4975,3230) 4975,3215 v1(5163.74,3026.26)
SPI_MOSI: M1.J1_16 U5.4 | length 1862.7
  Top Layer w10: M1.J1_16@4816.87,3381.02 4933.98,3381.02 v1(4934.49,3380.51) ; U5.4 v1(5085,3242)
  Bottom Layer w10: v1(4934.49,3380.51) 4946.49,3380.51 v1(5085,3242)
SPI_NCS: M1.J1_18 U5.5 | length 1692.3
  Top Layer w10: M1.J1_18@4850,3315 4880,3315 v1(4915,3280) ; U5.5 v1(5006.26,3003.74)
  Bottom Layer w10: v1(4915,3280) 4927.5,3267.5 4927.5,3182.5 5006.26,3103.74 v1(5006.26,3003.74)
SPI_RESET: M1.J1_19 U5.6 | length 2419.8
  Top Layer w10: v1(4496,3277.5) 4496,2989 4545,2940 4545,1948.22 4708.41,1784.81 4708.41,1620.09 4741,1587.5 4915.02,1587.5 4927.52,1600 U5.6 ; v1(4740,3295) 4760,3295 4768.47,3286.53 M1.J1_19@4816.87,3286.53
  Bottom Layer w10: v1(4496,3277.5) 4513.5,3295 v1(4740,3295)
SPI_SCK: M1.J1_20 R_AUX.1 | length 1153.3
  Top Layer w10: M1.J1_20@4816.87,3255.04 4816.91,3255 v1(4950,3255) ; v1(5242.48,3043.52) 5242.48,2407.52 R_AUX.1
  Bottom Layer w10: v1(4950,3255) 5031.82,3255 5242.48,3044.34 v1(5242.48,3043.52)
VBTN: 5V.1 K1.3 VOUT2.2 VOUT2.4 VOUT2.6 | length 1530.5
  Top Layer w20: VOUT2.2 6150,1100 6190,1060 6830,1060 6875,1105 5V.1@6875,1160
  Top Layer w60: K1.3 6150,1387.4 VOUT2.6 VOUT2.4 VOUT2.2
VCC3.3: 3.3V.1 BOOT.1 BOOT.2 C2.2 C3.1 C7.1 C8.2 C15.1 JTAG.1 JTAG.2 P3.1 R1.2 R4.1 R5.1 R6.1 R7.1 R9.2 R10.2 R11.2 R12.2 R13.2 R14.2 R15.2 SD_CARD.4 U1.2 U1.4 U5.1 VOUT1.2 VOUT1.4 VOUT1.6 | length 18077.2
  Top Layer w20: R13.2 1412.5,2435 1435,2412.5 1430.01,2310.24 R12.2@1430,2310 ; C2.2 1520,4550 1540,4530 P3.1 1620,4090 ; R12.2 1650,2310 ; R15.2 1620,4090 ; v1(1590,2155) 1590,2305 ; SD_CARD.4 1643.39,2203.39 1650,2210 C8.2 1650,2310 ; R9.2 1970,2289 1965,2294 R11.2 1965,2440 v1(1990,2465) ; v1(2290,2350) 2325,2315 R10.2 2320,1900 ; v1(2320,1780) 2320,1895 ; C7.1 v1(2580,4790) ; BOOT.1 BOOT.2 5195,1340 5321.22,1466.22 U5.1 ; U5.1@5330,1745 C15.1 5575,2667.5 5627.5,2720 5760,2720 ; U1.4 5765,3387.5 5782.5,3405 R7.1 ; v1(5849.04,2315.96) v1@5849.04,2320.96 ; R7.1@6100,3420 6175,3495 6175,3635 6120,3690 R6.1 ; R6.1@6110,3700 R5.1 6360,3785 JTAG.1 ; R6.1@6119.4,3693.82 R6.1 ; R6.1@6119.75,3692.48 R6.1 ; 6175,3702.5 R4.1 ; 6550,1540 6700,1540 3.3V.1 ; 1620,4090 1770,4090 R14.2 1662.5,3215.06 1650,3202.56 1650,2310
  Top Layer w50: v1(6355,1845) 6400,1845 6445,1800 R1.2 6615,1800 ; VOUT1.6 R1.2@6550,1779.94
  Top Layer w58: C3.1@6550,2450 6585,2450 6715,2320
  Top Layer w60: U1.4 U1.2 v1(5765,2405) v1@5849.04,2320.96 ; VOUT1.2 VOUT1.4 VOUT1.6 ; 6615,1800 6715,1900 6715,2320
  Bottom Layer w20: v1(1590,2155) 1955,1780 v1(2320,1780) 2335,1780 3010,1105 4220,1105 BOOT.2 ; P3.1 1575,4575 1575,4790 1642.5,4857.5 ; 1650,4865.42 2502.68,4865.42 v1(2580,4790) ; v1(1990,2465) 2175,2465 v1(2290,2350) ; JTAG.1 JTAG.2
  Bottom Layer w60: v1@5770,2400 6325,1845 v1(6355,1845)
VCC5: C4.1 C6.2 C13.2 C14.2 K1.2 M1.J1_58 M1.J1_59 M1.J1_60 U1.3 U3.1 U4.6 | length 7340.6
  Top Layer w10: M1.J1_58@4659.39,3790.47 M1.J1_60@4659.39,3853.46
  Top Layer w11.81: 4485.47,3790.47 M1.J1_58@4659.39,3790.47 ; M1.J1_60@4659.39,3853.46 M1.J1_60 4665,3853.46 C6.2
  Top Layer w20: U3.1 3165,1413 3170,1418 C13.2 ; C14.2 3860,1837 3935,1912 U4.6 ; v1@4260,2190 4260,3565 4485.47,3790.47 ; 5903.45,1790 5920,1790 ; 5967.5,2492.5 5975,2500
  Top Layer w50: 5975,2500 C4.1
  Top Layer w60: K1.2 5903.45,1790 ; U1.3 5880,2580 5967.5,2492.5 ; 5920,1790 5960,1830 5960,2485
  Bottom Layer w20: U3.1 3300,1465 3425,1465 U4.6 3935,1985 4135,2185 v1(4260,2185) 5452.4,2185 K1.2
VREF+: M1.J1_2 P1.1 | length 3718
  Top Layer w10: M1.J1_2@4816.87,3821.97 4818.84,3820 v1(4905,3820)
  Bottom Layer w10: P1.1 4749.72,3995 4905,3839.72 v1(4905,3820)
pads on no net: JTAG.11 JTAG.17 JTAG.19 K1.1 K1.4 K1.5 K1.6 M1.J1_5 M1.J1_6 M1.J1_9 M1.J1_11 M1.J1_12 M1.J1_13 M1.J1_14 M1.J1_23 M1.J1_24 M1.J1_28 M1.J1_29 M1.J1_32 M1.J1_33 M1.J1_35 M1.J1_45 M1.J1_46 M1.J1_48 M1.J1_49 M1.J1_50 M1.J1_51 M1.J1_52 M1.J1_53 M1.J1_54 M1.J2_4 M1.J2_5 M1.J2_6 M1.J2_7 M1.J2_9 M1.J2_10 M1.J2_11 M1.J2_12 M1.J2_13 M1.J2_14 M1.J2_15 M1.J2_21 M1.J2_22 M1.J2_23 M1.J2_24 M1.J2_26 M1.J2_27 M1.J2_28 M1.J2_29 M1.J2_30 M1.J2_32 M1.J2_33 M1.J2_34 M1.J2_35 M1.J2_36 M1.J2_37 M1.J2_38 M1.J2_39 M1.J2_40 M1.J2_41 M1.J2_42 M1.J2_43 M1.J2_44 M1.J2_45 M1.J2_46 M1.J2_47 M1.J2_48 M1.J2_49 M1.J2_50 M1.J2_51 M1.J2_52 M1.J2_53 M1.J2_54 M1.J2_55 M1.J2_56 M1.J2_57 M1.J2_58 M1.J2_59 M1.J2_60 SD_CARD.10 SD_CARD.11 SD_CARD.12 U2.2 U2.3 U2.4 U2.5 U2.6 U2.7 U2.14 U2.15 U2.16 U2.17 U2.19 U2.21 U2.22 U2.25 U5.B1 U5.B2 U5.B3 U5.B4 U5.B5 U5.B6 U5.B7

## Polygon pours and split planes (outlines as drawn)
GND on Top Layer "Top Layer-GND" (solid, remove dead copper, pour order 18): 1000,5000 1000,1000 7000,1000 7000,5000
no net on Top Layer "Top Layer-No Net 1" (solid, pour order 2): 7475,1185
no net on Top Layer "Top Layer-No Net 2" (solid, pour order 0): 5915,2705
GND on Bottom Layer "Bottom Layer-GND" (solid, remove dead copper, pour order 20): 1000,5000 1000,1000 7000,1000 7000,5000

## Other copper
Top Layer:
  rectangle net VCC3.3: 5540,2690 5985,3190

## Silkscreen, mask and mechanical layers (free items; w line width, h text height)
Top Overlay:
  text "GND SCL SDA D0 D2 D4 D6 PCLK PWDN" at 1545,4715 h30
  text "3.3 VSC HERF RST D1 D3 D5 D7 XCLK" at 1505,4410 h30
  text "Yining Huang / Yuefan Fu / Zijun Lin / Fangfui Qin" at 5635,4210 h60
  text "VREF+ 3.3V" at 1295,3930 h25 r90
  text "GND VCC AUX TXD RXD MD1 MD0" at 3805,2060 h25
  text "GND RST NCS MOSI MISO SCK 3.3" at 4745,1540 h25
  text "GND B0 VCC3.3" at 4190,1515 h25
  text "PWM3" at 5600,1350 h30
  text "GND" at 6340,1325 h30 r270
  text "GND" at 6740,1320 h30 r270
  text "PWM2" at 5600,1260 h30
  text "GND B1 VCC3.3" at 4230,1245 h25
  text "VCC5 GND TXD RXD PPS" at 3110,1225 h25
  text "VCC5" at 6060,1225 h30 r90
  text "VCC3.3" at 6470,1185 h30 r90
  text "PWM1" at 5600,1155 h30
  text "ECE477 Group <12> Motherboard V1.4" at 3180,1085 h60
Mechanical 1:
  lines w10: 1000,1000 6995,1000 7000,1005 7000,5000 1000,5000 1000,1000

## Text inside footprints (layer, text, board x,y; h text height)
VOUT1: Top Overlay "6" at 6570,1450 h50 r90; Top Overlay "5" at 6675,1450 h50 r90; Top Overlay "2" at 6570,1050 h50 r90; Top Overlay "1" at 6670,1070 h50 r90
VOUT2: Top Overlay "6" at 6165,1455 h50 r90; Top Overlay "5" at 6270,1455 h50 r90; Top Overlay "2" at 6170,1050 h50 r90; Top Overlay "1" at 6275,1070 h50 r90